# EAGLE board demux (EAGLE 5.06)
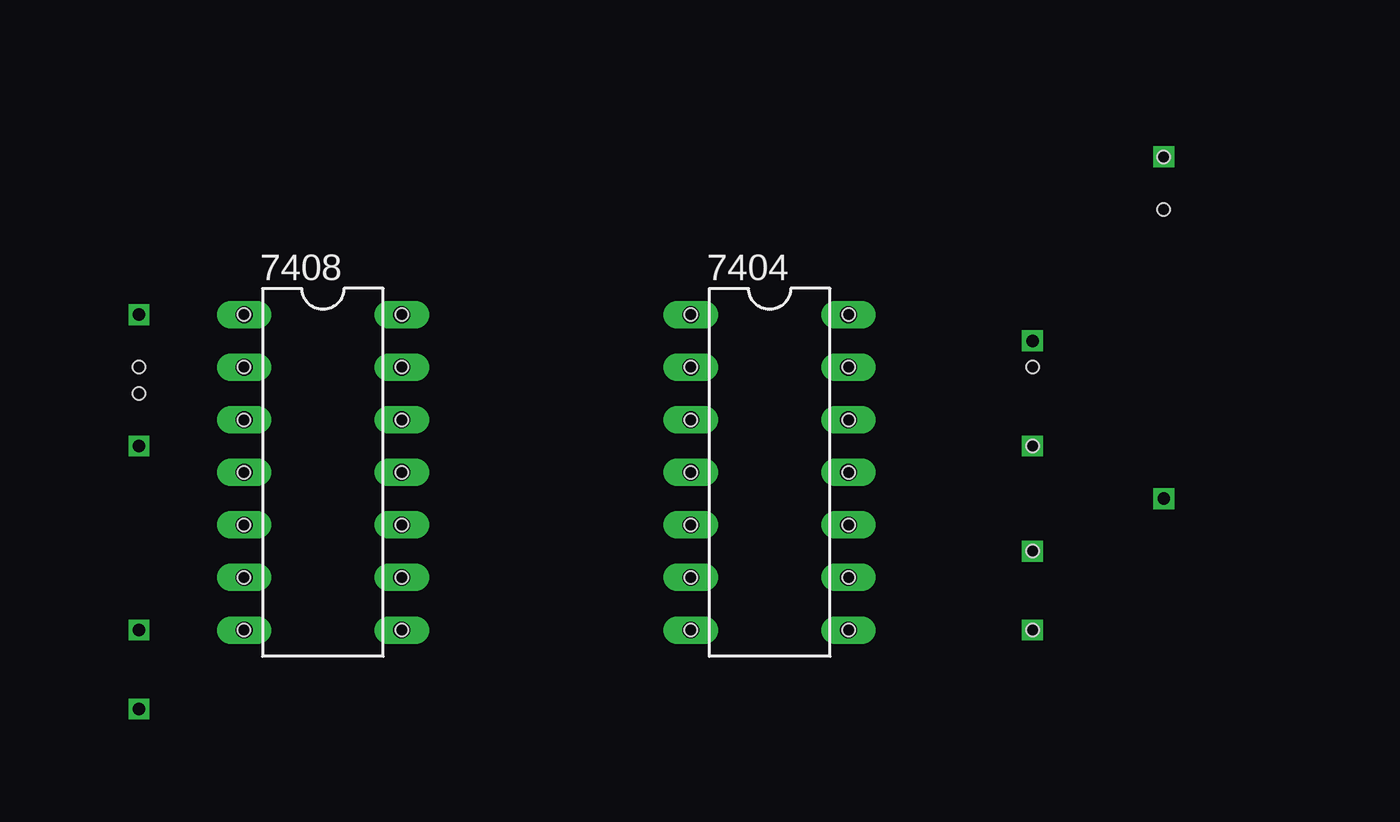
[diagram p0: board, top side]
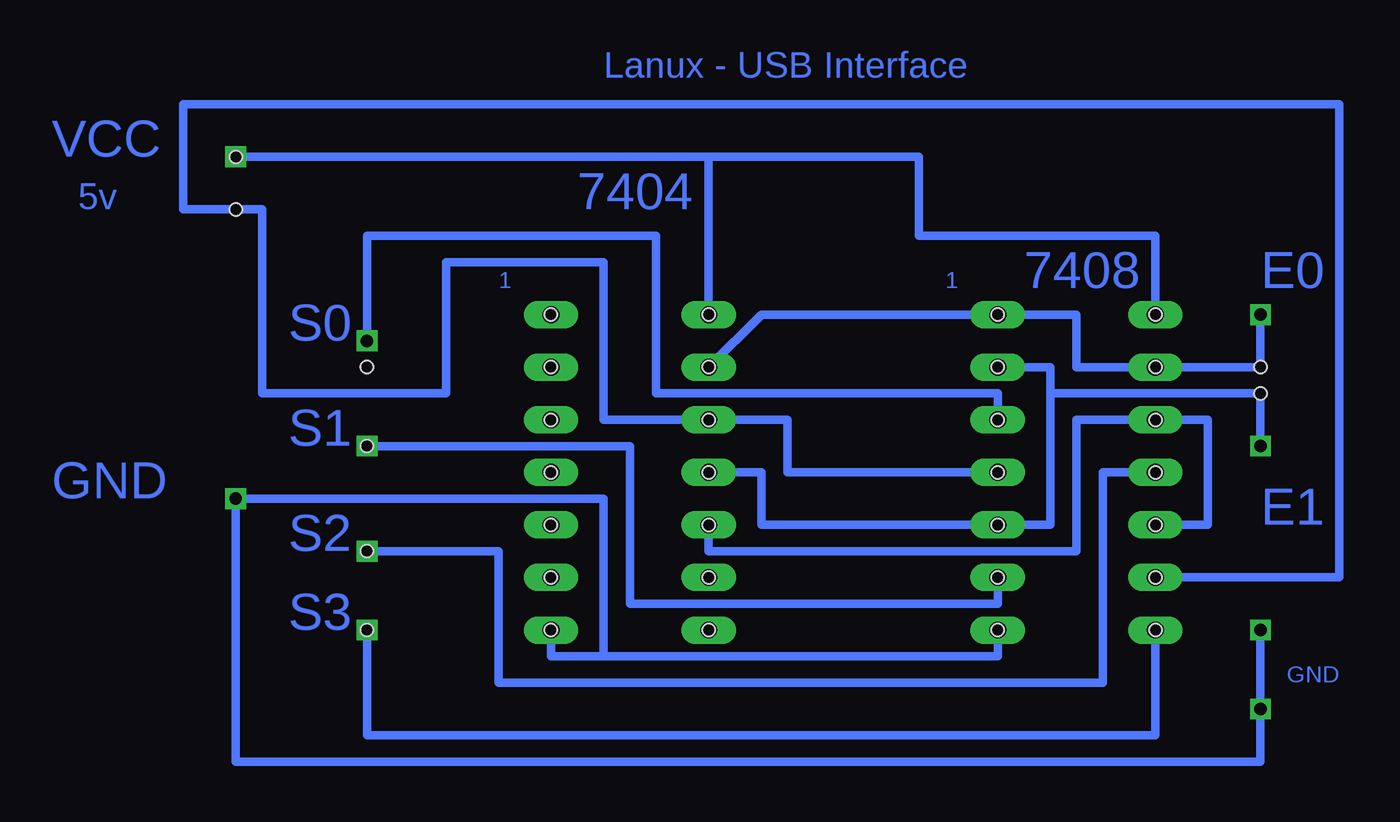
[diagram p1: board, bottom side, seen from below]

No outline drawn. Coordinates in mm, seen from the top.
Copper layers (1*16): Top 0.035mm / dielectric 1.5mm / Bottom 0.035mm
Design rules "default": minimum track width 10mil, minimum drill 24mil, track to track 8mil, track to pad 8mil, pad to pad 8mil, via to via 8mil, smd to smd 8mil, copper to edge 40mil, drill to drill 8mil, minimum pad ring 10mil, minimum via ring 8mil, stop-mask expansion 4mil, vias tented up to drill 0mil, thermal gap 10mil
Holes 0.6 mm at 68.58,29.21 68.58,36.83 68.58,44.45 60.96,44.45 82.55,44.45 82.55,44.45 82.55,41.91 90.17,29.21 60.96,29.21 60.96,31.75 60.96,34.29 60.96,36.83 60.96,39.37 60.96,41.91 60.96,44.45 68.58,41.91 68.58,39.37 68.58,36.83 68.58,34.29 68.58,31.75 68.58,29.21 82.55,29.21 82.55,31.75 82.55,34.29 82.55,36.83 82.55,39.37 90.17,44.45 90.17,41.91 90.17,39.37 90.17,36.83 90.17,34.29 90.17,31.75 90.17,29.21 99.06,29.21 99.06,33.02 99.06,38.1 99.06,38.1 99.06,41.91 105.41,49.53 105.41,52.07 60.96,29.21 55.88,40.64 55.88,41.91

## Footprints (pad centres in the part's own frame; a part is rotated, then mirrored left to right if it is on the bottom)
DIL14 = drill 0.813 long: 1 -7.62,-3.81; 2 -5.08,-3.81; 3 -2.54,-3.81; 4 0,-3.81; 5 2.54,-3.81; 6 5.08,-3.81; 7 7.62,-3.81; 8 7.62,3.81; 9 5.08,3.81; 10 2.54,3.81; 11 0,3.81; 12 -2.54,3.81; 13 -5.08,3.81; 14 -7.62,3.81

## Placement (x,y rotation side)
7404  [DIL14]  86.36,36.83 270 top
7408  [DIL14]  64.77,36.83 270 top

## Library data of the parts
7404 7408 = 74xx-us

## Nets
S$1: 7408.4
S$2: 7408.7
S$3: 7408.12
S$4: 7408.9
S$6: 7404.8 7408.8
S$7: 7404.5 7408.3 7408.5
S$9: 7404.1 7408.1
S$10: 7404.3 7408.6 7408.11
S$11: 7404.4 7408.10 7408.13
S$12: 7404.2 7408.2 7408.14

## Tracks (layer width: path | path; a pad name or v marks a point on that pad's centre or on a via)
S$1  (via drill 0.6)
  Bottom 0.406: 7408.4 63.5,36.83 63.5,26.67 92.71,26.67 92.71,33.02 v99.06,33.02
S$2  (via drill 0.6)
  Bottom 0.406: 7408.7 60.96,24.13 99.06,24.13 v99.06,29.21
S$3  (via drill 0.6)
  Bottom 0.406: 7408.12 68.58,40.64 85.09,40.64 85.09,48.26 99.06,48.26 v99.06,43.18
S$4  (via drill 0.6)
  Bottom 0.406: 7408.9 68.58,30.48 86.36,30.48 86.36,38.1 v99.06,38.1
S$6  (via drill 0.6)
  Bottom 0.406: 7404.8 90.17,27.94 87.63,27.94 | 87.63,27.94 68.58,27.94 7408.8 | 87.63,27.94 87.63,35.56 v105.41,35.56 105.41,22.86 55.88,22.86 v55.88,25.4 v55.88,29.21
S$7
  Bottom 0.406: 7404.5 82.55,33.02 64.77,33.02 64.77,39.37 7408.3 58.42,39.37 58.42,34.29 7408.5
S$9  (via drill 0.6)
  Bottom 0.406: 7408.1 60.96,48.26 72.39,48.26 72.39,52.07 82.55,52.07 | 82.55,52.07 v105.41,52.07 | 7404.1 82.55,52.07
S$10
  Bottom 0.406: 7408.11 78.74,36.83 78.74,39.37 7404.3 87.63,39.37 87.63,46.99 95.25,46.99 95.25,40.64 104.14,40.64 104.14,49.53 107.95,49.53 107.95,54.61 52.07,54.61 52.07,31.75 7408.6
S$11  (via drill 0.6)
  Bottom 0.406: 7404.4 80.01,36.83 80.01,34.29 7408.10 66.04,34.29 66.04,40.64 | 7408.13 66.04,41.91 66.04,40.64 | 66.04,40.64 55.88,40.64 v55.88,38.1
S$12  (via drill 0.6)
  Bottom 0.406: 7404.2 80.01,44.45 7408.14 64.77,44.45 64.77,41.91 7408.2 55.88,41.91 v55.88,44.45

## Text on the board
Bottom: Lanux - USB Interface | VCC | 7404 | 5v | E0 | 7408 | 1 | 1 | S0 | S1 | GND | E1 | S2 | S3 | GND